# Altium PCB PCB2.PcbDoc
Units mm, origin at the board's own origin, x right, y up, seen from the top; angles counter-clockwise.
Board outline 152.4 x 101.6 mm, 2 copper layers (Top Layer, Bottom Layer); 51 components, 37 nets, 185 pads, 0 vias.
Unrouted connection lines stored in the file: 8.
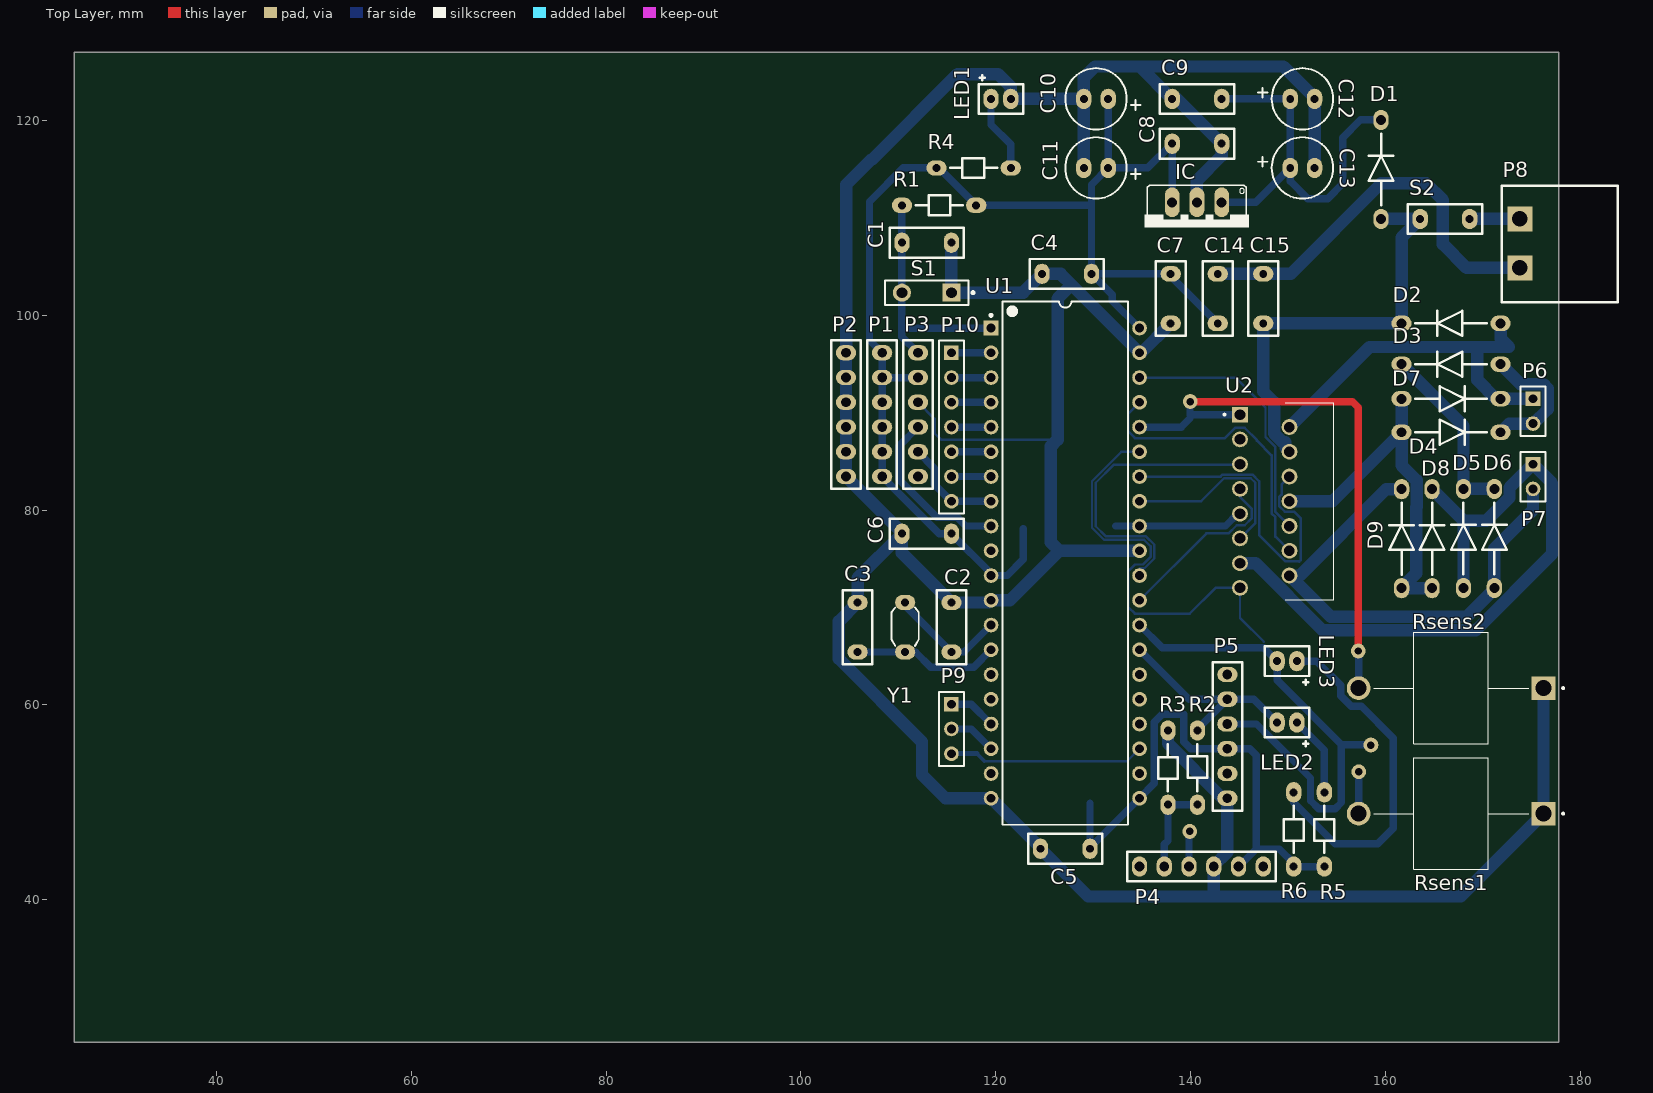
[diagram p0: Top Layer view]
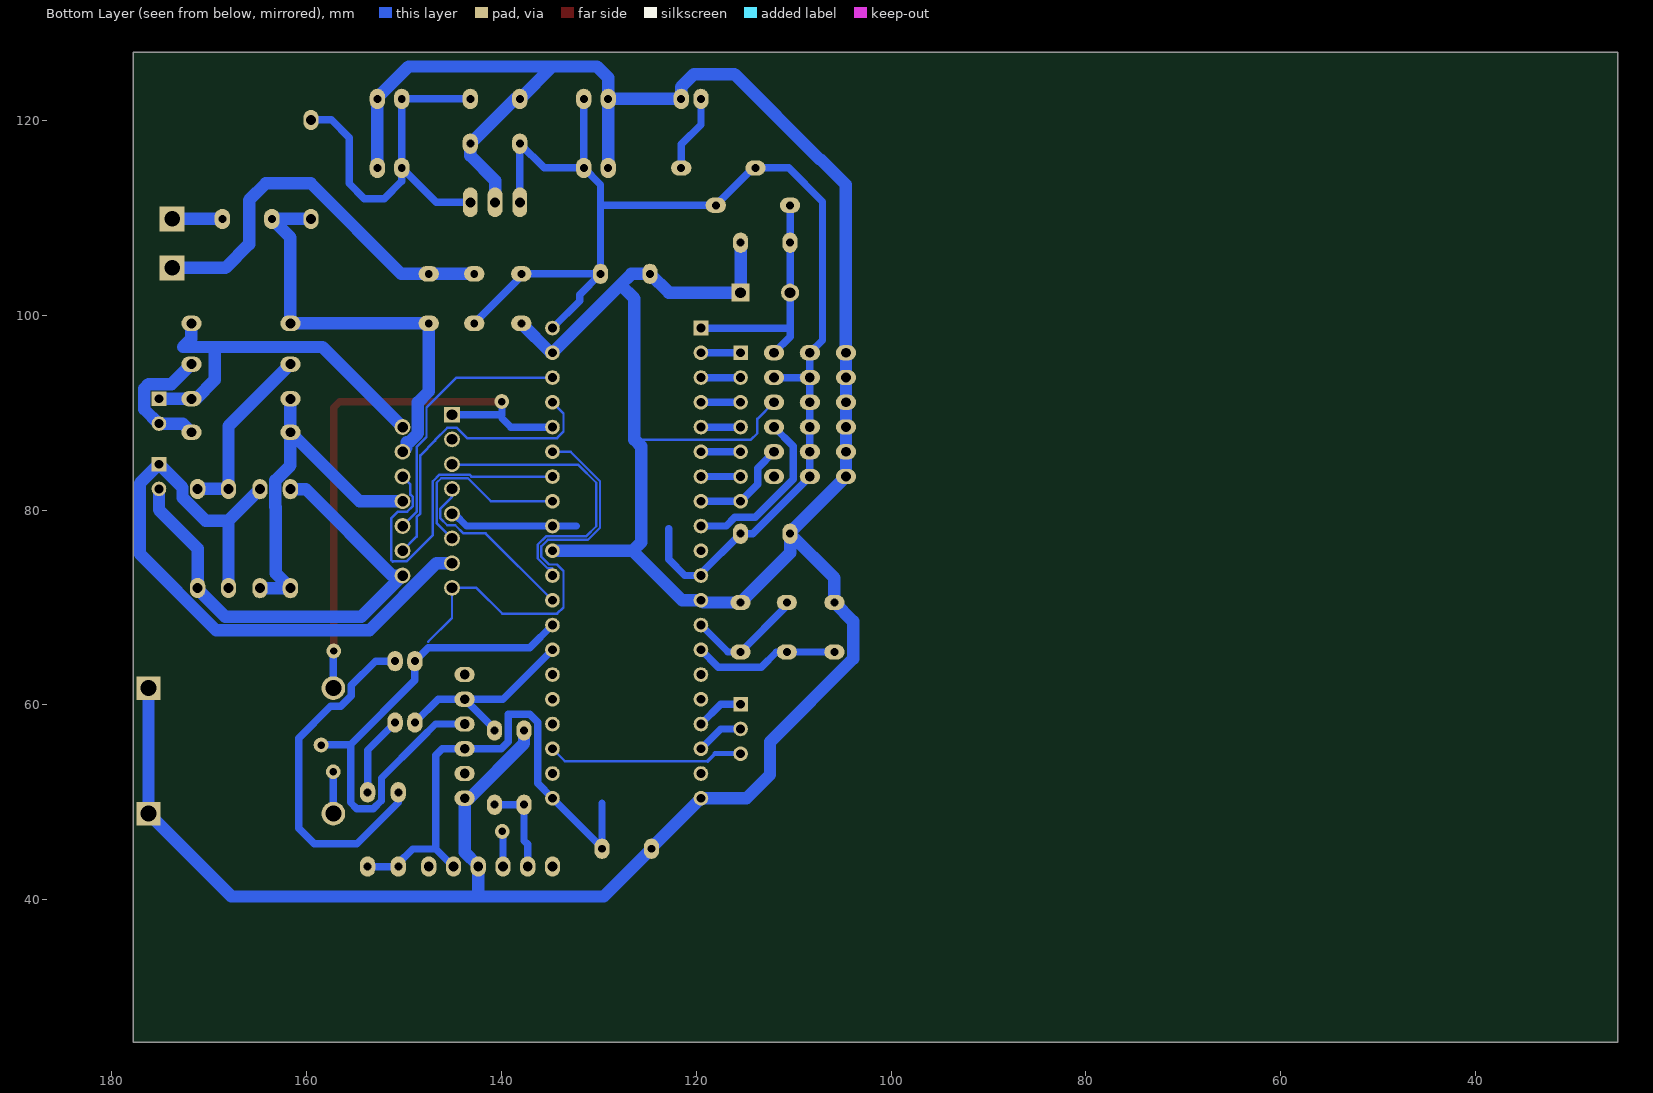
[diagram p1: Bottom Layer view, seen from below]

## Layer stack, top to bottom
Top Solder: solder mask 0.0102, Solder Resist, Dk 3.5
Top Layer: signal copper 0.0356
Dielectric 1: dielectric 0.32, FR-4, Dk 4.8
Bottom Layer: signal copper 0.0356
Bottom Solder: solder mask 0.0102, Solder Resist, Dk 3.5

## Board outline
25.4,25.4 177.8,25.4 177.8,127 25.4,127

## Design rules (kind name [scope] priority, off if disabled: settings)
Clearance [All] p1: gap=0.127 ignorepadtopadclearanceinfootprint=FALSE
PolygonConnect [All] p1: connectstyle=Relief reliefconductorwidth=0.254 reliefentries=4 polygonreliefangle="90 Angle" airgapwidth=0.254
RoutingVias [All] p1: holewidth=0.711 width=1.27 viastyle="Through Hole" minholewidth=0.711 minwidth=1.27 maxholewidth=0.711 maxwidth=1.27
SolderMaskExpansion [All] p1: expansion=0.102
Width Width_1 [InNetClass('PWR')] p1: maxlimit=1.27 minlimit=0.254 preferedwidth=1.27
Width [InNetClass('Signal')] p2: maxlimit=0.762 minlimit=0.254 preferedwidth=0.762
30 further rules are at their usual default settings.

## Classes and differential pairs
net class Signal: +5 INT0 INT1 INT2 MCLR NetC9_2 NetLED1_1 NetLED2_1 NetLED3_1 NetP4_5 OSC1 OSC2 PGC PGD PWM1 PWM2 RB0 RB1 RB2 RB3 RB4 RB5 RB9 RB10 RB11 RB12 RF0 RF1 U2RX U2TX
net class PWR: GND NetP8_2 OUT1 OUT2 OUT3 OUT4 VCC

## Components (designator, comment, footprint, x,y, rotation, side; value= is the part's Value field where it differs from the comment)
C1 "Cap" CAP200 115.443,107.442 r180 top value=100nF
C2 "Cap" CAP200 115.443,70.51 r270 top value=22pF
C3 "Cap" CAP200 105.816,70.51 r270 top value=22pF
C4 "Cap" CAP200 124.739,104.242 r0 top value=100nF
C5 "Cap" CAP200 124.587,45.237 r0 top value=100nF
C6 "Cap" CAP200 110.363,77.572 r0 top value=100nF
C7 "Cap" CAP200 137.947,99.162 r90 top value=100nF
C8 "Cap" CAP200 143.18,117.602 r180 top value=100nF
C9 "Cap" CAP200 138.1,122.199 r0 top value=100nF
C10 "Cap Pol1" RAD4 131.532,122.199 r180 top value=470uF
C11 "Cap Pol1" RAD4 131.532,115.113 r180 top value=470uF
C12 "Cap Pol1" RAD4 150.216,122.199 r0 top value=470uF
C13 "Cap Pol1" RAD4 150.216,115.113 r0 top value=470uF
C14 "Cap" CAP200 142.773,104.242 r270 top value=100nF
C15 "Cap" CAP200 147.447,104.242 r270 top value=100nF
D1 "Diode 1N4007" DIODE400 159.537,114.706 r270 top
D2 "Diode 1N5402" DIODE400 166.98,99.162 r0 top
D3 "Diode 1N5402" DIODE400 166.98,94.971 r0 top
D4 "Diode 1N5402" DIODE400 166.472,87.986 r180 top
D5 "Diode 1N5402" DIODE400 167.996,76.835 r270 top
D6 "Diode 1N5402" DIODE400 171.171,76.835 r270 top
D7 "Diode 1N5402" DIODE400 166.472,91.415 r180 top
D8 "Diode 1N5402" DIODE400 164.77,76.81 r270 top
D9 "Diode 1N5402" DIODE400 161.646,76.81 r270 top
IC "L7805" 78XXS 140.64,109.042 r180 top
LED1 "GREEN" LED_2 120.523,122.58 r0 top
LED2 "GREEN" LED_2 149.885,57.81 r180 top
LED3 "GREEN" LED_2 149.885,64.11 r180 top
P1 "5V" HEADER_6 108.331,89.789 r0 top
P2 "GND" HEADER_6 104.623,89.789 r0 top
P3 "Programator" HEADER_6 112.014,89.789 r0 top
P4 "Bluetooth" HEADER_6 141.097,43.409 r270 top
P5 "FT232" HEADER_6 143.764,56.769 r0 top
P6 "Motor 1" HDR1X2 175.133,91.415 r270 top
P7 "Motor 2" HDR1X2 175.133,84.709 r270 top
P8 "2EDGRC-5.08-02P-14-00A(H)" PWR_Con 177.851,107.772 r0 top
P9 "Interrupt" HDR1X3 115.443,60.071 r270 top
P10 "GPIO" HDR1X7 115.443,96.139 r270 top
R1 "Res1" RES400 114.173,111.277 r0 top value=10K
R2 "Res1" RES400 140.691,53.569 r90 top value=4.7K
R3 "Res1" RES400 137.668,53.569 r270 top value=10K
R4 "Res1" RES400 117.729,115.113 r180 top value=1K
R5 "Res1" RES400 153.721,47.219 r270 top value=1K
R6 "Res1" RES400 150.571,47.219 r270 top value=1K
Rsens1 "15W" DIOAD1898W129L762D1143 166.726,48.844 r180 top value=5
Rsens2 "15W" DIOAD1898W129L762D1143 166.726,61.722 r180 top value=5
S1 "SW-PB" SPST-2 112.903,102.311 r180 top
S2 "SW-SPST" CAP200 168.631,109.88 r180 top
U1 "DSPIC30F4013-20I/P" PDIP600-P40 127.127,74.549 r0 top
U2 "L298N" TO127P2020X500X2100-15 145.059,89.789 r0 top
Y1 "XTAL" OSC_5 110.693,68.351 r0 top

## Footprints (in the part's own frame and the unit in brackets; to place one, negate y for a bottom-side part, rotate by r counter-clockwise, add the part's x,y. Pads: shape width x height; smd on the part's side, far side on the other; paste and mask are expansions set on the pad)
78XXS [mil]
  oval 60x120 hole 40: GND(0,-100) IN(-100,-100) OUT(100,-100)
  silkscreen extent -210,-170 210,0
CAP200 [mil]
  oval 62x82 hole 32: 1(0,0) 2(200,0)
  silkscreen extent -50,-60 250,60
DIOAD1898W129L762D1143 [mm]
  round 2.43 hole 1.62: A(9.49,0)
  rect 2.43x2.43 / inner round 2.43 / far side rect 2.43x2.43 hole 1.62: C(-9.49,0)
  silkscreen extent -11.6,-5.72 7.96,5.72
DIODE400 [mil]
  oval 82x62 hole 40: 1(190,0) 2(-210,0)
  silkscreen extent -155,-50 135,50
HDR1X2 [mm] "Connector; Header; 2 Position"
  rect 1.5x1.5 hole 0.9: 1(0,0)
  round 1.5 hole 0.9: 2(2.54,0)
  silkscreen extent -1.27,-1.27 3.81,1.27
HDR1X3 [mm] "Connector; Header; 3 Position"
  rect 1.5x1.5 hole 0.9: 1(0,0)
  round 1.5 hole 0.9: 2(2.54,0) 3(5.08,0)
  silkscreen extent -1.27,-1.27 6.35,1.27
HDR1X7 [mm] "Connector; Header; 7 Position"
  rect 1.5x1.5 hole 0.9: 1(0,0)
  round 1.5 hole 0.9: 2(2.54,0) 3(5.08,0) 4(7.62,0) 5(10.16,0) 6(12.7,0) 7(15.24,0)
  silkscreen extent -1.27,-1.27 16.51,1.27
HEADER_6 [mil]
  oval 82x62 hole 39.37: 1(0,250) 2(0,150) 3(0,50) 4(0,-50) 5(0,-150) 6(0,-250)
  silkscreen extent -60,-300 60,300
LED_2 [mil]
  oval 62x82 hole 32: 1(40,-15) 2(-40,-15)
  silkscreen extent -90,-75 90,80, body extent -105,-126 110,106, height 346
OSC_5 [mil]
  oval 82x62 hole 32: 1(0,-115) 2(0,85)
  silkscreen extent -55,-90 55,65, body extent -92,-240 92,207, height 138
PDIP600-P40 [mm] "DIP, 40-Leads, Row Spacing 15.24mm, Pitch 2.54mm, Body 51.8x13.5mm"
  rect 1.5x1.5 hole 0.9: 1(-7.62,24.13)
  round 1.5 hole 0.9: 2(-7.62,21.59) 3(-7.62,19.05) 4(-7.62,16.51) 5(-7.62,13.97) 6(-7.62,11.43) 7(-7.62,8.89) 8(-7.62,6.35) 9(-7.62,3.81) 10(-7.62,1.27) 11(-7.62,-1.27) 12(-7.62,-3.81) 13(-7.62,-6.35) 14(-7.62,-8.89) 15(-7.62,-11.43) 16(-7.62,-13.97) 17(-7.62,-16.51) 18(-7.62,-19.05) 19(-7.62,-21.59) 20(-7.62,-24.13) 21(7.62,-24.13) 22(7.62,-21.59) 23(7.62,-19.05) 24(7.62,-16.51) 25(7.62,-13.97) 26(7.62,-11.43) 27(7.62,-8.89) 28(7.62,-6.35) 29(7.62,-3.81) 30(7.62,-1.27) 31(7.62,1.27) 32(7.62,3.81) 33(7.62,6.35) 34(7.62,8.89) 35(7.62,11.43) 36(7.62,13.97) 37(7.62,16.51) 38(7.62,19.05) 39(7.62,21.59) 40(7.62,24.13)
  silkscreen extent -7.74,-26.85 6.45,26.85, body extent -7.3,-26.85 7.3,26.85, height 6.35
PWR_Con [mil]
  rect 100x100 hole 62.99: 1(-160,-115) 2(-160,83)
  silkscreen extent -234,-253 236,217, body extent -239,-256 234,222, height 344
RAD4 [mil]
  oval 62x82 hole 32: 1(0,0) 2(98.43,0)
  silkscreen extent -131,-124 173,124
RES400 [mil]
  oval 82x62 hole 32: 1(-150,0) 2(150,0)
  silkscreen extent -95,-40 95,40
SPST-2 [mm] "Switch; 2 Leads"
  rect 1.85x1.85 hole 1.1: 1(-2.54,0)
  round 1.85 hole 1.1: 2(2.54,0)
  silkscreen extent -4.89,-1.27 4.28,1.27
TO127P2020X500X2100-15 [mm]
  rect 1.62x1.62 hole 1.08: 1(0,0)
  round 1.62 hole 1.08: 2(5.08,-1.27) 3(0,-2.54) 4(5.08,-3.81) 5(0,-5.08) 6(5.08,-6.35) 7(0,-7.62) 8(5.08,-8.89) 9(0,-10.16) 10(5.08,-11.43) 11(0,-12.7) 12(5.08,-13.97) 13(0,-15.24) 14(5.08,-16.51) 15(0,-17.78)
  silkscreen extent -1.69,-18.99 9.63,1.21

## Part data
C1 C2 C3 C4 C5 C6 C7 C8 C9 C14 C15: "Capacitor", LatestRevisionDate=17-Jul-2002, LatestRevisionNote="Re-released for DXP Platform.", PackageDescription="Radial Cap, Thru-Hole; 2 Leads; 0.3 in Pin Spacing", PackageReference=RAD-0.3, Published=8-Jun-2000, Publisher="Altium Limited"
C10 C11 C12 C13: "Polarized Capacitor (Radial)", LatestRevisionDate=17-Jul-2002, LatestRevisionNote="Re-released for DXP Platform.", PackageDescription="Polarized Capacitor (Radial); 2 Leads", PackageReference=RB7.6-15, Published=8-Jun-2000, Publisher="Altium Limited"
D1: "1 Amp General Purpose Rectifier", Code_JEDEC=DO-204-AL, ComponentLink1Description="Manufacturer Link", ComponentLink1URL=http://www.fairchildsemi.com/, ComponentLink2Description=Datasheet, ComponentLink2URL=http://www.fairchildsemi.com/ds/1N%2F1N4001.pdf, DatasheetVersion=1998, LatestRevisionDate=17-Jul-2002, LatestRevisionNote="Re-released for DXP Platform.", PackageDescription="Diode, Axial; Body 5.2 x 2.7 mm (LxDia. max), Lead Dia. 0.86 mm (max)", PackageReference=DO-41, PackageVersion=Aug-1999, Published=8-Jun-2000, Publisher="Altium Limited"
D2 D3 D4 D5 D6 D7 D8 D9: "3 Amp General Purpose Rectifier", ComponentLink1Description="Manufacturer Link", ComponentLink1URL=http://www.fairchildsemi.com/, ComponentLink2Description=Datasheet, ComponentLink2URL=http://www.fairchildsemi.com/ds/1N%2F1N5400.pdf, DatasheetVersion=1998, LatestRevisionDate=17-Jul-2002, LatestRevisionNote="Re-released for DXP Platform.", PackageDescription="Diode, Axial; Body 9.5 x 5.6 mm (LxDia. max), Lead Dia. 1.32 mm (max)", PackageReference=DO-201AD, PackageVersion=Aug-1999, Published=8-Jun-2000, Publisher="Altium Limited"
IC: "Linear Voltage Regulator IC 1 Output 1.5A D2PAK", Package="TO-263-3 Inchange Semiconductor", Availability=Unavailable, MF=STMicroelectronics, MP=L7805, Price=None, SnapEDA_Link=https://www.snapeda.com/parts/L7805/STMicroelectronics/view-part/563125/?ref=snap
LED1 LED2 LED3: library part LED1, "Typical RED GaAs LED", LatestRevisionDate=08-Jul-2005, LatestRevisionNote="Mech Layer 1 removed.", PackageDescription="LED; 2 Leads", PackageReference=LED-1, Published=8-Jun-2000, Publisher="Altium Limited"
P1 P2 P3 P4 P5: library part "Header 6", "Header, 6-Pin", LatestRevisionDate=17-Jul-2002, LatestRevisionNote="Re-released for DXP Platform.", Publisher="Altium Limited"
P6 P7: library part "Header 2", "Header, 2-Pin", LatestRevisionDate=17-Jul-2002, LatestRevisionNote="Re-released for DXP Platform.", Publisher="Altium Limited"
P8: library part 00000002, "TERM BLOCK HDR 2POS 90DEG 5.08MM", Manufacturer Part Number=2EDGRC-5.08-02P-14-00A(H), Price=0.1304, Suplier=TME, Suplier Product Link=https://www.tme.eu/en/details/2edgrc5.08-2p14/pluggable-terminal-blocks/degson-electronics/2edgrc-508-02p-14-00ah/
P9: library part "Header 3", "Header, 3-Pin", LatestRevisionDate=17-Jul-2002, LatestRevisionNote="Re-released for DXP Platform.", Publisher="Altium Limited"
P10: library part "Header 7", "Header, 7-Pin", LatestRevisionDate=17-Jul-2002, LatestRevisionNote="Re-released for DXP Platform.", Publisher="Altium Limited"
R1 R2 R3 R4 R5 R6: "Resistor", LatestRevisionDate=17-Jul-2002, LatestRevisionNote="Re-released for DXP Platform.", PackageDescription="Axial Device, Thru-Hole; 2 Leads; 0.3 in Pin Spacing", PackageReference=AXIAL-0.3, Published=8-Jun-2000, Publisher="Altium Limited"
Rsens1 Rsens2: library part Res1, "Resistor", LatestRevisionDate=17-Jul-2002, LatestRevisionNote="Re-released for DXP Platform.", PackageDescription="Axial Device, Thru-Hole; 2 Leads;", Published=8-Jun-2000, Publisher="Altium Limited"
S1: "Switch", LatestRevisionDate=17-Jul-2002, LatestRevisionNote="Re-released for DXP Platform.", PackageDescription="Switch; 2 Leads", PackageReference=SPST-2, Published=24-Mar-1999, Publisher="Altium Limited"
S2: "Single-Pole, Single-Throw Switch", LatestRevisionDate=17-Jul-2002, LatestRevisionNote="Re-released for DXP Platform.", PackageDescription="Switch; 2 Leads", PackageReference=SPST-2, Published=24-Mar-1999, Publisher="Altium Limited"
U1: "High-Performance 16-bit Digital Signal Controller, 48 KB Flash, 2 KB SRAM, 1 KB EEPROM, 40-Pin PDIP, Industrial Temperature", Supplier Part Number 1=DSPIC30F4013-20IP-ND, ComponentLink1Description=Datasheet, ComponentLink1URL=http://ww1.microchip.com/downloads/en/DeviceDoc/70138F.pdf, ComponentLink2Description="Packaging Specification", ComponentLink2URL=http://www.microchip.com/stellent/groups/techpub_sg/documents/packagingspec/en012702.pdf, ComponentLink3Description="Microchip.com Home", ComponentLink3URL=http://www.microchip.com/, DatasheetVersion="revF, Apr-2008", PackageDescription="40-Lead Plastic Dual In-Line (P) - 600 mil Body [PDIP]", PackageReference=PDIP600-P40, PackageVersion="revBB, Aug-2009", Published=29-Jan-2009, Publisher="Altium Limited", Supplier 1=Digi-Key, Supplier 2=Farnell, Supplier Part Number 2=1439755
U2: "Dual Full Bridge Motor Driver 15-Pin(15+Tab) MULTIWATT V Tube", Package=None, Availability=Unavailable, MP=L298N, Price=None
Y1: "Crystal Oscillator", LatestRevisionDate=17-Jul-2002, LatestRevisionNote="Re-released for DXP Platform.", PackageDescription="Crystal, Thru-Hole; 2 Leads; Body 3.1 x 8.2 mm (Dia.xH)", PackageReference=R38, Published=8-Jun-2000, Publisher="Altium Limited"

## Free pads (board coordinates)
  round 1.524 hole 0.762: 4(158.496,55.88) 5(139.903,47.015) 6(157.251,53.137) 7(139.954,91.135) 8(157.201,65.532)

## Nets (pads, with @x,y where several pads share a name; then routed paths per layer and width w, separated by ;. In a path a pad name is that pad's centre, name@x,y a point inside that pad or via, vN(x,y) a via of type N, cw(c..) or ccw(c..) an arc to the next point about the centre after c; other vN are vias at no path point)
+5: C4.2 C5.2 C6.2 C7.2 C8.2 C10.1 C11.1 C14.2 IC.OUT P1.1 P1.2 P1.3 P1.4 P1.5 P1.6 P3.2 P4.2 P5.4 R1.2 R4.2 R5.2 R6.2 U1.11 U1.21 U1.32 U1.40 U2.9 | length 204
  Bottom Layer w0.762: P3.2 P1.2 ; 122.834,78.105 122.834,74.955 121.158,73.279 U1.11 119.507,73.508 C6.2 114.179,77.572 108.331,83.42 P1.6 P1.5 P1.4 P1.3 P1.2 ; C5.2 C5.2@129.667,45.339 ; 129.667,49.886 C5.2@129.667,45.339 ; C10.1 C11.1 ; 132.309,78.359 U1.32 143.567,78.359 144.837,79.629 U2.9 ; U1.40 131.966,101.46 131.966,102.095 C4.2 ; IC.OUT C8.2 135.611,115.113 C11.1 ; C14.2 137.947,103.988 C7.2 C4.2 ; P4.2 146.71,45.212 ; R5.2 R6.2 150.571,43.739 149.098,45.212 146.71,45.212 ; P1.2 P1.1 107.036,97.434 107.036,111.658 110.49,115.113 R4.2 114.148,115.113 R1.2 129.769,111.277 129.819,111.328 ; C5.2@129.667,45.339 U1.21 136.271,51.943 136.271,56.485 136.246,56.51 136.246,58.222 137.079,59.055 139.268,59.055 139.268,56.231 140,55.499 P5.4 146.05,55.499 146.71,54.839 146.71,45.212 ; C4.2 129.819,111.328 ; 129.819,111.328 129.819,113.4 C11.1
GND: C1.1 C2.1 C3.1 C4.1 C5.1 C6.1 C7.1 C8.1 C9.1 C10.2 C11.2 C12.2 C13.2 C14.1 C15.1 D4.1 D7.1 D8.1 D9.1 IC.GND LED1.1 P2.1 P2.2 P2.3 P2.4 P2.5 P2.6 P3.3 P4.3 P5.6 P8.1 R3.1 Rsens1.C Rsens2.C S1.1 U1.12 U1.20 U1.31 U1.39 U2.8 | length 454.8
  Bottom Layer w0.254: P3.3 113.716,89.357 113.716,87.884 114.376,87.224 126.34,87.224
  Bottom Layer w1.27: P3.3 P3.3@112.141,91.059 ; C1.1 S1.1 122.809,102.311 C4.1 126.644,104.242 127.762,103.124 ; C11.2 C10.2 ; U1.31 126.517,75.819 ; R3.1 137.668,56.035 143.284,50.419 P5.6 143.764,44.89 142.367,43.493 P4.3 142.367,40.665 ; C7.1 134.925,96.139 U1.39 127.762,103.124 ; IC.GND 140.64,113.817 143.18,116.357 C8.1 138.582,122.199 C9.1 134.772,125.527 ; C14.1 C15.1 150.266,104.242 159.563,113.538 164.16,113.538 165.887,111.811 165.887,107.29 168.326,104.851 P8.1 ; U2.8 154.559,80.899 D4.1 ; C13.2 C12.2 152.716,122.324 149.513,125.527 134.772,125.527 ; D7.1 D4.1 ; D8.1 D9.1 163.144,73.482 163.144,80.289 163.195,80.34 163.195,83.039 161.646,84.589 D4.1 ; Rsens2.C Rsens1.C 167.707,40.335 129.489,40.335 C5.1 124.587,45.339 U1.20 114.833,50.419 112.42,52.832 112.42,56.202 103.886,64.736 103.886,68.58 C3.1 105.816,73.025 C6.1 ; C6.1 110.363,77.699 P2.6 P2.5 P2.4 P2.3 P2.2 P2.1 104.648,96.164 104.648,113.411 107.213,115.976 107.315,115.976 116.078,124.739 120.218,124.739 121.539,123.419 LED1.1 C10.2 ; C6.1 110.363,75.59 C2.1 119.278,70.51 U1.12 121.437,70.739 126.517,75.819 ; 126.517,75.819 125.654,76.683 125.654,86.538 126.34,87.224 126.34,101.702 127.762,103.124 ; C10.2 129.032,124.384 130.175,125.527 134.772,125.527
INT0: P9.1 U1.17 | length 4.9
  Bottom Layer w0.762: P9.1 117.475,60.071 U1.17
INT1: P9.3 U1.23 | length 20.1
  Bottom Layer w0.254: 118.808,54.242 133.49,54.242 U1.23
  Bottom Layer w0.381: 118.059,54.991 118.808,54.242
  Bottom Layer w0.508: P9.3 118.059,54.991
INT2: P9.2 U1.18 | length 4.9
  Bottom Layer w0.762: P9.2 117.475,57.531 U1.18
MCLR: C1.2 P3.1 R1.1 S1.2 U1.1 | length 25
  Bottom Layer w0.762: R1.1 C1.2 S1.2 110.363,98.73 ; P3.1 110.363,97.79 110.363,98.73 ; U1.1 110.414,98.679 110.363,98.73
NetC9_2: C9.2 C12.1 C13.1 D1.2 IC.IN | length 40.1
  Bottom Layer w0.762: IC.IN 146.685,111.582 C13.1 ; C9.2 C12.1 C13.1 ; D1.2 157.429,120.04 155.6,118.212 155.6,113.513 154.051,111.963 152.019,111.963 150.216,113.767 C13.1
NetLED1_1: LED1.2 R4.1 | length 7.9
  Bottom Layer w0.762: LED1.2 119.507,119.558 121.539,117.526 R4.1
NetLED2_1: LED2.2 R5.1 | length 8.3
  Bottom Layer w0.762: LED2.2 153.721,55.372 R5.1
NetLED3_1: LED3.2 R6.1 | length 36.7
  Bottom Layer w0.762: R6.1 150.571,49.987 154.813,45.745 159.207,45.745 160.807,47.346 160.807,56.591 157.527,59.872 156.469,59.872 155.386,60.956 155.386,62.013 152.908,64.491 LED3.2
NetP4_5: P4.5 R2.1 R3.2 | length 9.5
  Bottom Layer w0.762: P4.5 137.287,45.695 137.668,46.076 R3.2 R2.1
NetP8_2: P8.2 S2.1 | length 5.2
  Bottom Layer w1.27: S2.1 P8.2
OSC1: C2.2 U1.13 Y1.2 | length 12.3
  Bottom Layer w0.762: Y1.2 110.693,70.18 C2.2 116.738,65.43 U1.13
OSC2: C3.2 U1.14 Y1.1 | length 15.1
  Bottom Layer w0.762: C3.2 Y1.1 111.76,65.43 113.309,63.881 117.729,63.881 U1.14
OUT1: D2.1 D7.2 P6.1 U2.2 | length 38.6
  Bottom Layer w1.27: U2.2 158.352,96.732 169.418,96.732 ; D2.1 171.806,97.595 172.669,96.732 169.418,96.732 ; P6.1 D7.2 171.348,91.415 169.418,93.345 169.418,96.732
OUT2: D3.1 D4.2 P6.2 U2.3 | length 13.8
  Bottom Layer w1.27: D4.2 172.695,88.875 P6.2 175.171,88.875 176.645,90.349 176.645,92.48 176.199,92.927 173.85,92.927 D3.1
OUT3: D5.1 D8.2 P7.1 U2.13 | length 69.8
  Bottom Layer w1.27: U2.13 146.646,74.549 153.53,67.666 169.272,67.666 177.079,75.473 177.079,82.763 P7.1 172.72,82.296 172.72,81.273 170.365,78.918 167.996,78.918 ; D8.2 167.996,78.918 ; D5.1 167.996,78.918
OUT4: D6.1 D9.2 P7.2 U2.14 | length 51.1
  Bottom Layer w1.27: D9.2 160.071,82.144 151.206,73.279 U2.14 154.356,69.063 168.351,69.063 171.171,71.882 D6.1 171.171,76.053 175.133,80.016 P7.2
PGC: P3.5 P10.7 U1.8 | length 10.6
  Bottom Layer w0.762: P3.5 113.69,84.303 113.69,82.652 P10.7 U1.8
PGD: P3.4 U1.9 | length 17.6
  Bottom Layer w0.762: P3.4 110.033,86.538 110.033,83.155 113.939,79.248 116.032,79.248 116.921,78.359 U1.9
PWM1: U1.34 U2.6 | length 34.1
  Bottom Layer w0.254: U1.34 143.073,83.439 143.279,83.645 146.326,83.645 147.012,82.959 147.012,77.441 149.699,74.755 151.076,74.755 151.13,74.701 151.308,74.879 151.308,79.121 150.594,79.835 149.654,79.835 149.075,80.414 149.075,81.34 149.327,81.591 149.327,82.626 U2.6
PWM2: U1.33 U2.11 | length 19.4
  Bottom Layer w0.254: U1.33 141.072,80.899 143.437,83.264 146.169,83.264 146.631,82.801 146.631,78.661 U2.11
RB0: P10.1 U1.2 | length 4.1
  Bottom Layer w0.762: P10.1 U1.2
RB1: P10.2 U1.3 | length 4.1
  Bottom Layer w0.762: P10.2 U1.3
RB2: P10.3 U1.4 | length 4.1
  Bottom Layer w0.762: P10.3 U1.4
RB3: P10.4 U1.5 | length 4.1
  Bottom Layer w0.762: P10.4 U1.5
RB4: P10.5 U1.6 | length 4.1
  Bottom Layer w0.762: P10.5 U1.6
RB5: P10.6 U1.7 | length 4.1
  Bottom Layer w0.762: P10.6 U1.7
RB9: U1.38 U2.10 | length 27.4
  Bottom Layer w0.254: U1.38 144.602,93.599 147.678,90.523 147.678,87.5 148.694,86.484 148.694,79.804 U2.10
RB10: U1.37 U2.12 | length 30.6
  Bottom Layer w0.254: U1.37 133.616,89.928 133.616,88.05 134.278,87.388 143.514,87.388 144.566,88.44 145.553,88.44 146.789,87.203 146.789,87.131 148.313,85.607 148.313,79.646 148.692,79.268 148.692,77.267 U2.12
RB11: pad.7 pad.8 Rsens2.A U1.36 U2.1 | length 58.4
  Top Layer w0.762: pad.7 156.591,91.135 157.201,90.526 pad.8
  Bottom Layer w0.762: U1.36 139.014,88.519 139.929,89.433 ; pad.7 139.929,91.11 139.929,89.789 U2.1 ; pad.8 157.236,65.497 Rsens2.A
RB12: pad.6 Rsens1.A U1.35 U2.15 | length 49
  Bottom Layer w0.254: U1.35 132.893,85.979 129.87,82.956 129.87,78.181 131.101,76.95 135.215,76.95 135.878,76.287 135.878,75.197 135.091,74.41 134.279,74.41 133.616,73.747 133.616,70.016 134.264,69.367 139.903,69.367 142.545,72.009 U2.15 145.059,68.936 147.498,66.497
  Bottom Layer w0.762: Rsens1.A 157.236,53.121 pad.6
RF0: U1.30 U2.5 | length 31
  Bottom Layer w0.254: U1.30@134.772,73.279 U1.30 134.747,74.029 135.248,74.029 136.259,75.04 136.259,76.445 135.373,77.331 131.259,77.331 130.251,78.339 130.251,82.799 132.085,84.633 144.983,84.633 U2.5
RF1: U1.29 U2.7 | length 18.7
  Bottom Layer w0.254: U1.29 141.605,77.597 143.883,77.597 144.724,78.438 145.553,78.438 146.25,79.136 146.25,80.14 145.059,81.331 U2.7
  Bottom Layer w0.762: U1.29 U1.29@134.925,70.739
U2RX: LED3.1 P4.4 P5.3 pad.4 pad.5 U1.28 | length 56.5
  Bottom Layer w0.762: U1.28 137.084,65.862 147.498,65.862 LED3.1 148.869,62.535 155.473,55.931 ; P4.4 139.827,46.939 pad.5 ; P5.3 146.756,58.039 148.28,56.515 148.285,56.515 152.298,52.502 152.298,50.185 153.132,49.352 154.838,49.352 155.473,49.987 155.473,55.931 ; pad.4 158.445,55.931 155.473,55.931
U2TX: LED2.1 P5.2 R2.2 U1.27 | length 21.7
  Bottom Layer w0.762: U1.27 139.827,60.579 P5.2 ; R2.2 140.691,57.506 P5.2 ; LED2.1 146.482,60.579 P5.2
VCC: C15.2 D1.1 D2.2 D3.2 D5.2 D6.2 S2.2 U2.4 | length 62.8
  Bottom Layer w1.27: U2.4 149.733,86.385 149.733,86.947 149.488,86.947 148.567,87.868 148.567,91.047 147.447,92.167 C15.2 D2.2 161.646,107.975 S2.2 D1.1 ; D3.2 167.996,88.621 D5.2 D6.2
pads on no net: P3.6 P4.1 P4.6 P5.1 P5.5 U1.10 U1.15 U1.16 U1.19 U1.22 U1.24 U1.25 U1.26

## Text inside footprints (layer, text, board x,y; h text height)
IC: Mechanical 13 "-" at 141.275,112.854 h1.27 r180; Mechanical 13 "I" at 143.819,112.857 h1.27 r180; Mechanical 13 "O" at 138.733,112.855 h1.27 r180